# EAGLE board M627E (EAGLE 6.6.0)
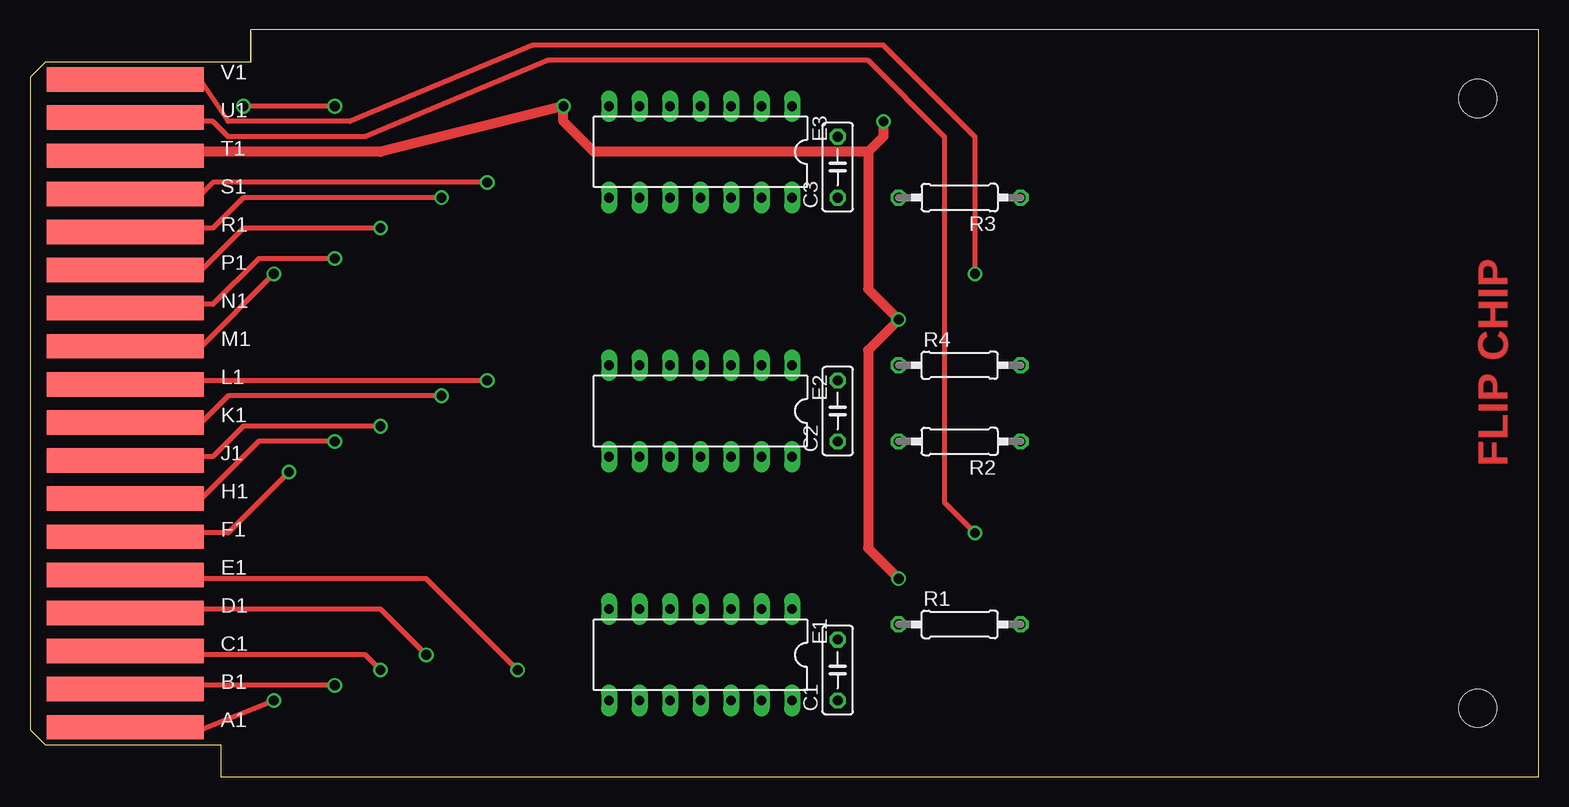
[diagram p0: board, top side]
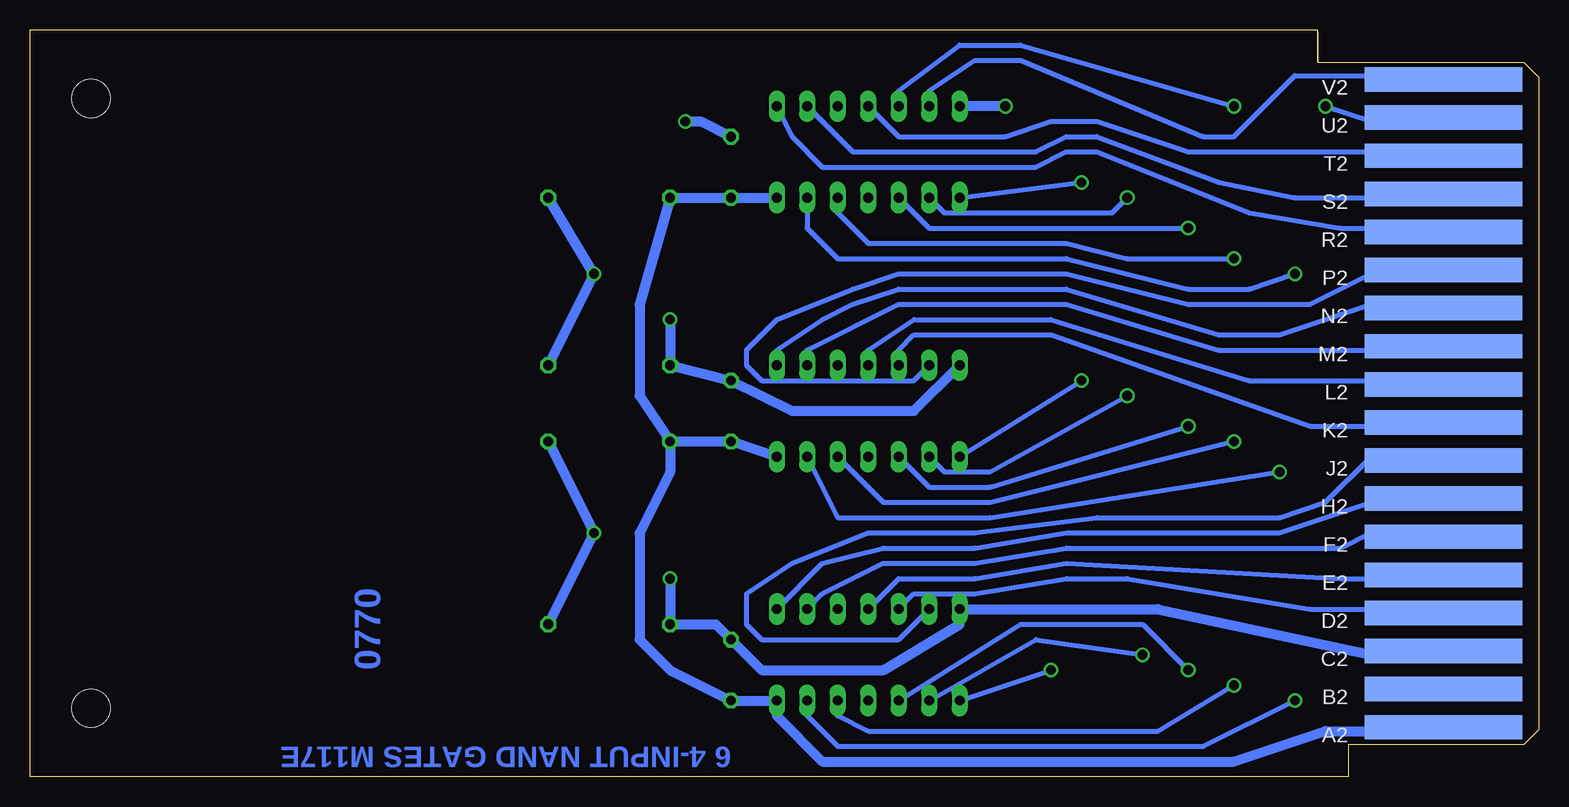
[diagram p1: board, bottom side, seen from below]

Size 125.73 x 62.23 mm. Coordinates in mm from the lower left corner, seen from the top.
Copper layers (1+16): Top 0.035mm / dielectric 1.5mm / Bottom 0.035mm
Design rules "16mils": minimum track width 16mil, minimum drill 32mil, track to track 15mil, track to pad 10mil, pad to pad 10mil, via to via 10mil, smd to smd 10mil, copper to edge 13mil, drill to drill 10mil, minimum pad ring 10mil, minimum via ring 8mil, stop-mask expansion 0mil, vias tented up to drill 0mil, thermal gap 10mil

## Footprints (pad centres in the part's own frame; a part is rotated, then mirrored left to right if it is on the bottom)
C050-025X075 = drill 0.813 octagon: 1 -2.54,0; 2 2.54,0
DIL14 = drill 0.813 long: 1 -7.62,-3.81; 2 -5.08,-3.81; 3 -2.54,-3.81; 4 0,-3.81; 5 2.54,-3.81; 6 5.08,-3.81; 7 7.62,-3.81; 8 7.62,3.81; 9 5.08,3.81; 10 2.54,3.81; 11 0,3.81; 12 -2.54,3.81; 13 -5.08,3.81; 14 -7.62,3.81
0207/10 = drill 0.813 octagon: 1 -5.08,0; 2 5.08,0
SINGLE = hole 3.175: 120.65,56.515; 120.65,5.715
EDGE-CON2 = smd 13.106 x 2.032: A1 7.938,4.128; B1 7.938,7.303; C1 7.938,10.477; D1 7.938,13.652; E1 7.938,16.828; F1 7.938,20.003; H1 7.938,23.177; J1 7.938,26.352; K1 7.938,29.527; L1 7.938,32.703; M1 7.938,35.877; N1 7.938,39.053; P1 7.938,42.227; R1 7.938,45.403; S1 7.938,48.578; T1 7.938,51.752; U1 7.938,54.928; V1 7.938,58.102 | smd 13.106 x 2.032 bottom: A2 7.938,4.128; B2 7.938,7.303; C2 7.938,10.477; D2 7.938,13.652; E2 7.938,16.828; F2 7.938,20.003; H2 7.938,23.177; J2 7.938,26.352; K2 7.938,29.527; L2 7.938,32.703; M2 7.938,35.877; N2 7.938,39.053; P2 7.938,42.227; R2 7.938,45.403; S2 7.938,48.578; T2 7.938,51.752; U2 7.938,54.928; V2 7.938,58.102

## Placement (x,y rotation side)
C1  .01uf  [C050-025X075]  67.31,8.89 90 top
C2  .01uf  [C050-025X075]  67.31,30.48 90 top
C3  .01uf  [C050-025X075]  67.31,50.8 90 top
E1  74H40N  [DIL14]  55.88,10.16 180 top
E2  74H40N  [DIL14]  55.88,30.48 180 top
E3  74H40N  [DIL14]  55.88,52.07 180 top
R1  750  [0207/10]  77.47,12.7 0 top
R2  330  [0207/10]  77.47,27.94 180 top
R3  330  [0207/10]  77.47,48.26 180 top
R4  750  [0207/10]  77.47,34.29 0 top
U$1  OUTLINE-SINGLE  [SINGLE]  0,0 0 top
U$2  [EDGE-CON2]  0,0 0 top
U$3  [FLIPCHIP]  125.73,62.23 180 top

## Library data of the parts
C1-C3 R1-R4 = rcl
E1-E3 = 74xx-us
U$1-U$3 = dec-con

## Nets
A1: E1.13 U$2.A1
B1: E1.12 U$2.B1
C1: E1.10 U$2.C1
D1: E1.9 U$2.D1
D2: E1.5 U$2.D2
E1: E1.8 U$2.E1
E2: E1.4 U$2.E2
F1: E2.13 U$2.F1
F2: E1.2 U$2.F2
GND: C1.2 C2.2 C3.2 E1.7 E2.7 E3.7 R1.1 R4.1 U$2.C2 U$2.T1
H1: E2.12 U$2.H1
H2: E1.1 U$2.H2
J1: E2.10 U$2.J1
J2: E1.6 U$2.J2
K1: E2.9 U$2.K1
K2: E2.5 U$2.K2
L1: E2.8 U$2.L1
L2: E2.4 U$2.L2
M1: E3.13 U$2.M1
M2: E2.2 U$2.M2
N1: E3.12 U$2.N1
N2: E2.1 U$2.N2
P1: E3.10 U$2.P1
P2: E2.6 U$2.P2
R1: E3.9 U$2.R1
R2: E3.1 U$2.R2
S1: E3.8 U$2.S1
S2: E3.2 U$2.S2
T2: E3.4 U$2.T2
U1: R1.2 R2.1 U$2.U1
U2: E3.5 U$2.U2
V1: R3.1 R4.2 U$2.V1
V2: E3.6 U$2.V2
VCC: C1.1 C2.1 C3.1 E1.14 E2.14 E3.14 R2.2 R3.2 U$2.A2

## Tracks (layer width: path | path; a pad name or v marks a point on that pad's centre or on a via)
A1  (via drill 0.81)
  Top 0.406: U$2.A1 8.89,3.81 13.97,3.81 v20.32,6.35
  Bottom 0.406: E1.13 60.96,5.08 58.42,2.54 27.94,2.54 v20.32,6.35
B1  (via drill 0.81)
  Top 0.406: U$2.B1 8.89,7.62 v25.4,7.62
  Bottom 0.406: E1.12 58.42,5.08 55.88,3.81 31.75,3.81 v25.4,7.62
C1  (via drill 0.81)
  Top 0.406: U$2.C1 8.89,10.16 27.94,10.16 v29.21,8.89
  Bottom 0.406: E1.10 43.18,12.7 33.02,12.7 v29.21,8.89
D1  (via drill 0.81)
  Top 0.406: U$2.D1 8.89,13.97 29.21,13.97 v33.02,10.16
  Bottom 0.406: E1.9 41.91,11.43 v33.02,10.16
D2
  Bottom 0.406: E1.5 52.07,15.24 46.99,15.24 39.37,16.51 34.29,16.51 19.05,13.97 8.89,13.97 U$2.D2
E1  (via drill 0.81)
  Top 0.406: U$2.E1 8.89,16.51 33.02,16.51 v40.64,8.89
  Bottom 0.406: E1.8 v40.64,8.89
E2
  Bottom 0.406: E1.4 53.34,16.51 46.99,16.51 39.37,17.78 16.51,16.51 8.89,16.51 U$2.E2
F1  (via drill 0.81)
  Top 0.406: U$2.F1 8.89,20.32 16.51,20.32 v21.59,25.4
  Bottom 0.406: E2.13 58.42,21.59 45.72,21.59 v21.59,25.4
F2
  Bottom 0.406: E1.2 59.69,15.24 54.61,17.78 46.99,17.78 39.37,19.05 16.51,19.05 13.97,20.32 8.89,20.32 U$2.F2
GND  (via drill 0.81)
  Top 0.813: 69.85,52.07 46.99,52.07 44.45,54.61 v44.45,55.88 29.21,52.07 8.89,52.07 U$2.T1 | 69.85,52.07 71.12,53.34 v71.12,54.61 | v72.39,16.51 69.85,19.05 69.85,35.56 v72.39,38.1 69.85,40.64 69.85,52.07
  Bottom 0.813: E2.7 52.07,30.48 62.23,30.48 C2.2 R4.1 v72.39,38.1 | v44.45,55.88 E3.7 | v71.12,54.61 69.85,54.61 C3.2 | v72.39,16.51 R1.1 68.58,12.7 C1.2 64.77,8.89 54.61,8.89 48.26,12.7 E1.7 31.75,13.97 13.97,10.16 8.89,10.16 U$2.C2
H1  (via drill 0.81)
  Top 0.406: U$2.H1 8.89,22.86 13.97,22.86 19.05,27.94 v25.4,27.94
  Bottom 0.406: E2.12 54.61,22.86 45.72,22.86 v25.4,27.94
H2
  Bottom 0.406: E1.1 59.69,17.78 54.61,19.05 46.99,19.05 39.37,20.32 21.59,20.32 13.97,22.86 8.89,22.86 U$2.H2
J1  (via drill 0.81)
  Top 0.406: U$2.J1 8.89,26.67 15.24,26.67 17.78,29.21 v29.21,29.21
  Bottom 0.406: E2.10 50.8,24.13 45.72,24.13 v29.21,29.21
J2
  Bottom 0.406: E1.6 53.34,11.43 64.77,11.43 66.04,12.7 66.04,15.24 62.23,17.78 55.88,20.32 46.99,20.32 36.83,21.59 21.59,21.59 17.78,22.86 13.97,26.67 8.89,26.67 U$2.J2
K1  (via drill 0.81)
  Top 0.406: U$2.K1 8.89,29.21 13.97,29.21 16.51,31.75 v34.29,31.75
  Bottom 0.406: E2.9 49.53,25.4 45.72,25.4 v34.29,31.75
K2
  Bottom 0.406: E2.5 53.34,35.56 52.07,36.83 40.64,36.83 19.05,29.21 8.89,29.21 U$2.K2
L1  (via drill 0.81)
  Top 0.406: U$2.L1 8.89,33.02 v38.1,33.02
  Bottom 0.406: E2.8 v38.1,33.02
L2
  Bottom 0.406: E2.4 55.88,35.56 52.07,38.1 40.64,38.1 24.13,33.02 10.16,33.02 U$2.L2
M1  (via drill 0.81)
  Top 0.406: U$2.M1 8.89,35.56 13.97,35.56 v20.32,41.91
  Bottom 0.406: E3.13 60.96,45.72 58.42,43.18 39.37,43.18 29.21,40.64 24.13,40.64 v20.32,41.91
M2
  Bottom 0.406: E2.2 60.96,35.56 53.34,39.37 39.37,39.37 26.67,35.56 8.89,35.56 U$2.M2
N1  (via drill 0.81)
  Top 0.406: U$2.N1 8.89,39.37 15.24,39.37 19.05,43.18 v25.4,43.18
  Bottom 0.406: E3.12 58.42,46.99 55.88,44.45 39.37,44.45 34.29,43.18 v25.4,43.18
N2
  Bottom 0.406: E2.1 63.5,35.56 59.69,38.1 57.15,39.37 53.34,40.64 39.37,40.64 26.67,36.83 21.59,36.83 13.97,39.37 8.89,39.37 U$2.N2
P1  (via drill 0.81)
  Top 0.406: U$2.P1 8.89,41.91 13.97,41.91 17.78,45.72 v29.21,45.72
  Bottom 0.406: E3.10 50.8,45.72 v29.21,45.72
P2
  Bottom 0.406: E2.6 52.07,33.02 64.77,33.02 66.04,34.29 66.04,35.56 63.5,38.1 57.15,40.64 53.34,41.91 39.37,41.91 29.21,39.37 19.05,39.37 13.97,41.91 8.89,41.91 U$2.P2
R1  (via drill 0.81)
  Top 0.406: U$2.R1 8.89,45.72 15.24,45.72 17.78,48.26 v34.29,48.26
  Bottom 0.406: E3.9 49.53,46.99 35.56,46.99 v34.29,48.26
R2
  Bottom 0.406: E3.1 62.23,53.34 59.69,50.8 41.91,50.8 39.37,52.07 36.83,52.07 24.13,46.99 16.51,45.72 8.89,45.72 U$2.R2
S1  (via drill 0.81)
  Top 0.406: U$2.S1 8.89,48.26 13.97,48.26 15.24,49.53 v38.1,49.53
  Bottom 0.406: E3.8 v38.1,49.53
S2
  Bottom 0.406: E3.2 57.15,52.07 41.91,52.07 39.37,53.34 36.83,53.34 26.67,49.53 20.32,48.26 8.89,48.26 U$2.S2
T2
  Bottom 0.406: E3.4 53.34,53.34 44.45,53.34 40.64,54.61 36.83,54.61 29.21,52.07 8.89,52.07 U$2.T2
U1  (via drill 0.81)
  Top 0.406: U$2.U1 8.89,54.61 15.24,54.61 16.51,53.34 27.94,53.34 43.18,59.69 69.85,59.69 76.2,53.34 76.2,22.86 v78.74,20.32
  Bottom 0.813: R1.2 v78.74,20.32 R2.1
U2  (via drill 0.81)
  Top 0.406: v25.4,55.88 v17.78,55.88
  Bottom 0.406: E3.5 53.34,57.15 48.26,60.96 43.18,60.96 v25.4,55.88 | U$2.U2 8.89,54.61 13.97,54.61 v17.78,55.88
V1  (via drill 0.81)
  Top 0.406: U$2.V1 8.89,58.42 13.97,58.42 16.51,54.61 26.67,54.61 41.91,60.96 71.12,60.96 78.74,53.34 v78.74,41.91
  Bottom 0.813: R3.1 v78.74,41.91 R4.2
V2
  Bottom 0.406: U$2.V2 8.5,58.03 8.89,58.42 20.32,58.42 25.4,53.34 27.94,53.34 43.18,59.69 46.99,59.69 50.8,57.15 E3.6
VCC
  Bottom 0.813: E3.14 C3.1 R3.2 74.93,39.37 74.93,31.75 R2.2 | R2.2 C2.1 E2.14 | U$2.A2 8.89,3.81 17.78,3.81 25.4,1.27 59.69,1.27 63.5,5.08 E1.14 C1.1 72.39,8.89 74.93,11.43 74.93,20.32 72.39,25.4 R2.2

## Text on the board
Bottom: 0770 | 6 4-INPUT NAND GATES M117E
tDocu: Use M117 Etch.